# Altium PCB LM-008.PcbDoc
Units mm, origin at the board's own origin, x right, y up, seen from the top; angles counter-clockwise.
Board outline 67.05 x 70.02 mm, 2 copper layers (Top Layer, Bottom Layer); 32 components, 24 nets, 139 pads, 9 vias.
Unrouted connection lines stored in the file: 1.
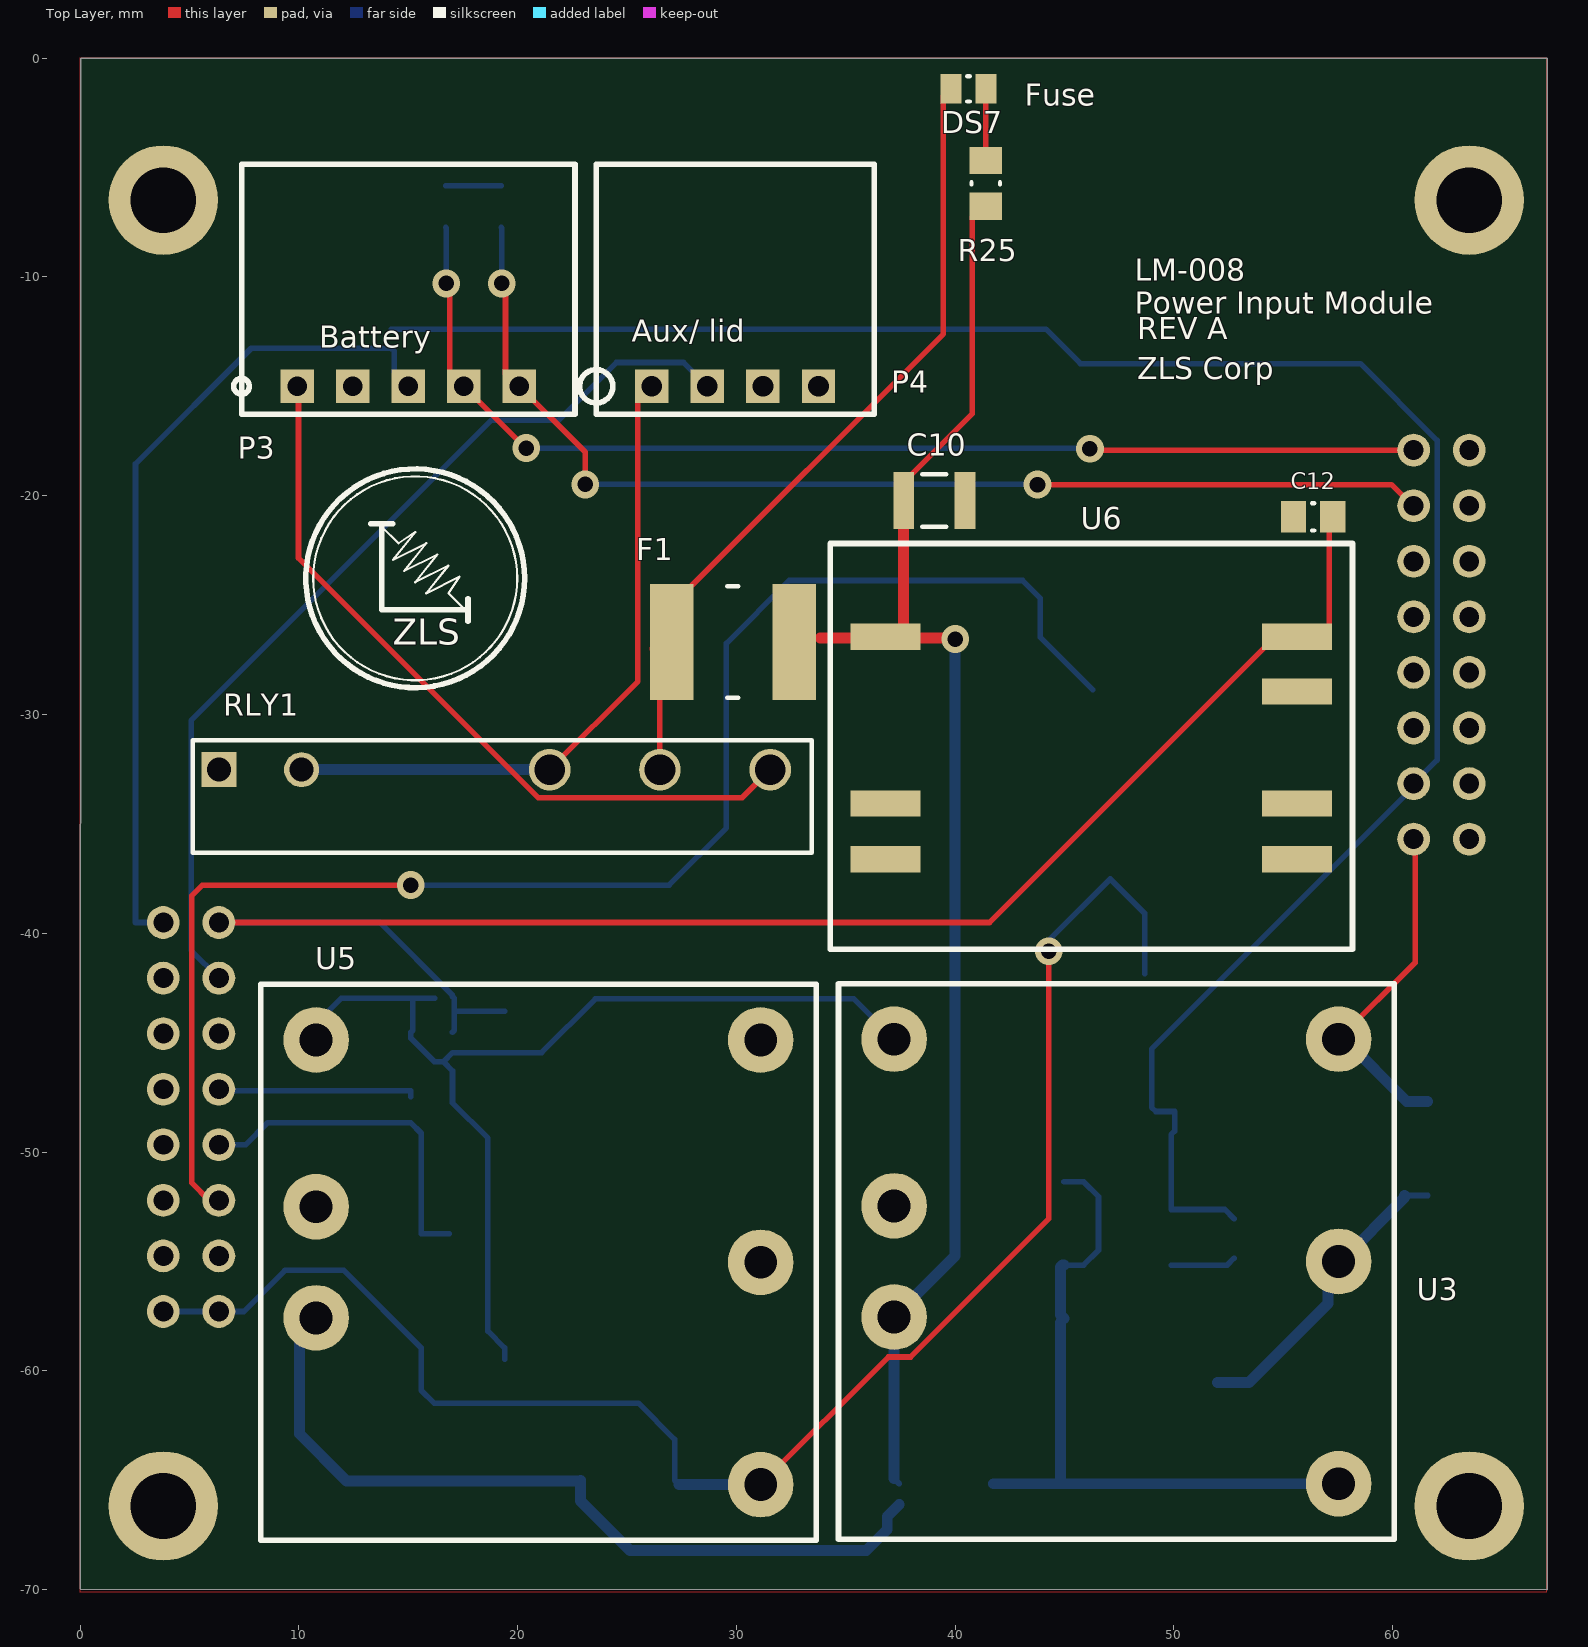
[diagram p0: Top Layer view]
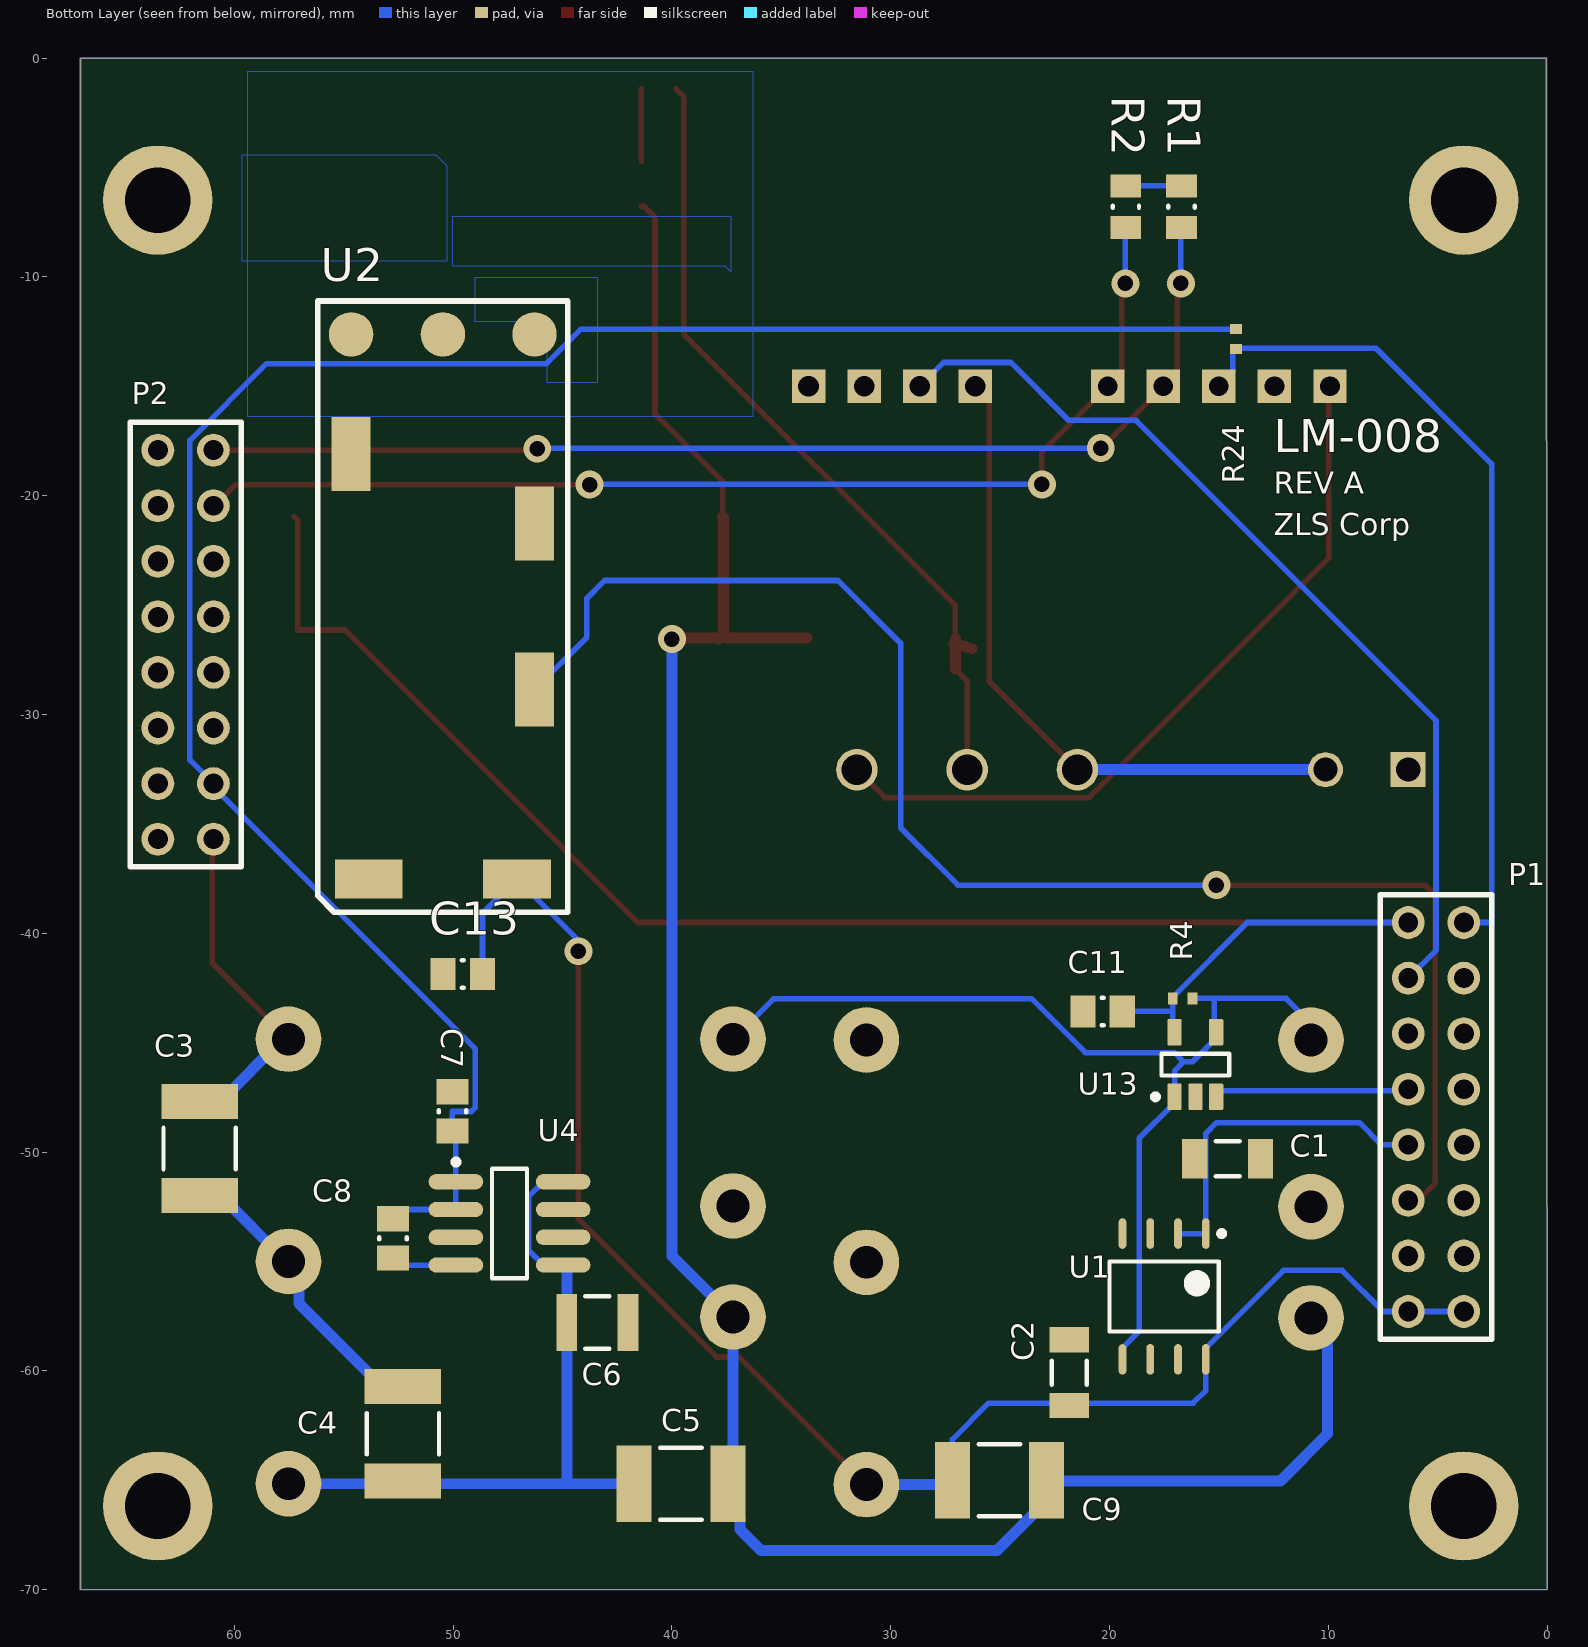
[diagram p1: Bottom Layer view, seen from below]

## Layer stack, top to bottom
Top Solder: solder mask 0.0102, Solder Resist, Dk 3.5
Top Layer: signal copper 0.0356
Dielectric 1: dielectric 0.32, FR-4, Dk 4.8
Bottom Layer: signal copper 0.0356
Bottom Solder: solder mask 0.0102, Solder Resist, Dk 3.5

## Board outline
0,-69.988 67.049,-70.013 67.049,0.002 0.025,0

## Design rules (kind name [scope] priority, off if disabled: settings)
Clearance [All] p1: gap=0.2 ignorepadtopadclearanceinfootprint=TRUE except(0.1: SMDPad-SMDPad)
HoleSize [All] p1: absolutevalues=TRUE maxlimit=5 minlimit=0.025 maxpercent=80.000 minpercent=20.000
MinimumSolderMaskSliver [All] p1: minsoldermaskwidth=0.095
PolygonConnect [All] p1: connectstyle=Relief reliefconductorwidth=0.254 reliefentries=4 polygonreliefangle="90 Angle" airgapwidth=0.254
RoutingVias [All] p1: holewidth=0.711 width=1.27 viastyle="Through Hole" minholewidth=0.711 minwidth=1.27 maxholewidth=0.711 maxwidth=1.27
SilkToSilkClearance [All] p1: silktosilkclearance=0.2
SilkToSolderMaskClearance [IsPad] p1: minsilkscreentomaskgap=0.175 clearancetoexposedcopper=TRUE
SolderMaskExpansion [All] p1: expansion=0.102
Width [All] p1: maxlimit=1 minlimit=0.254 preferedwidth=0.254
26 further rules are at their usual default settings.

## Classes and differential pairs
component class Power_Input: DS7 F1 P3 P4 P? R1 R2 R24 R25 RL2 RL? RLY1
component class LM-008: C1 C2 C3 C4 C5 C6 C7 C8 C9 C10 C11 C12 C13 P1 P2 R4 U1 U2 U3 U4 U5 U6 U13

## Components (designator, comment, footprint, x,y, rotation, side; value= is the part's Value field where it differs from the comment)
C1 "CAP CER 1UF 50V X7R 1210" CAPC1206(3216)130_N 14.598,-50.303 r0 bottom
C2 "CAP CER 1UF 50V X7R 1210" CAPC1206(3216)130_N 21.837,-60.082 r270 bottom
C3 "CAP CER 470PF 3KV X7R 1812" CAPC1812(4532)230_M 61.59,-49.835 r270 bottom
C4 "CAP CER 470PF 3KV X7R 1812" CAPC1812(4532)230_M 52.292,-62.876 r90 bottom
C5 "CAP CER 470PF 3KV X7R 1812" CAPC1812(4532)230_M 39.592,-65.162 r0 bottom
C6 "CAP CER 1UF 50V X7R 1210" CAPC1210(3225)100_L 43.403,-57.785 r0 bottom
C7 "CAP CER 10UF 10V X7R 0805" CAPC0805(2012)145_N 50.031,-48.144 r270 bottom
C8 "CAP CER 10000PF 25V X7R 0805" CAPC0805(2012)145_N 52.751,-53.95 r270 bottom
C9 "CAP CER 470PF 3KV X7R 1812" CAPC1812(4532)230_M 25.025,-65 r0 bottom
C10 "CAP CER 1UF 50V X7R 1210" CAPC1210(3225)100_L 39.043,-20.213 r180 top
C11 "CAP CER 0.1UF 16V X7R 0805" CAPC0805(2012)145_N 20.313,-43.572 r0 bottom
C12 "CAP CER 10UF 10V X7R 0805" CAPC0805(2012)145_N 56.356,-20.966 r0 top
C13 "CAP CER 1UF 16V X7R 0805" CAPC0805(2012)145_N 49.555,-41.859 r180 bottom
DS7 "Lite-On LTST-S220KGKT Green LED, 571 nm 2012 (0805) Side View, Rectangle Lens SMD package" 0805C_L 40.608,-1.408 r0 top
F1 "PCT" CAPC7451X12N 29.838,-26.681 r0 top
P1 "TLW-108-05-G-D" TLW-108-05-G-D 5.073,-48.398 r270 bottom
P2 "TLW-108-05-G-D" TLW-108-05-G-D 62.223,-26.808 r270 bottom
P3 "IPL1-105-01-F-S-RA" IPL1-105-01-F-S-RA 15,-15 r0 top
P4 "IPL1-104-01-L-S-RA-K" IPL1-104-01-L-S-RA-K 26.13,-15 r0 top
R1 "3K74 0.125W 1% 0805 (2012 Metric)  SMD" RESC0805(2012)_N 16.709,-6.79 r90 bottom
R2 "3K74 0.125W 1% 0805 (2012 Metric)  SMD" RESC0805(2012)_N 19.249,-6.79 r90 bottom
R4 "100K" RESC0402(1005)_L 16.657,-42.977 r0 bottom
R24 "6.98K" RESC0402(1005)_L 14.217,-12.838 r90 bottom
R25 "RES SMD 4.7K OHM 1% 1/8W 0805" RESC0805(2012)_M 41.395,-5.726 r90 top
RLY1 "APF30312" PNSC-PF-5-2800x500x1500_V 6.343,-32.523 r0 top
U1 "BD90GA3WEFJ-E2" TSOP127P600X100-8N 17.5,-56.6 r270 bottom
U2 "ABXS002A3X41-SRZ" ABXS002A3X41-SRZ 50.47,-25.07 r90 bottom
U3 "PXB15-24WD05/N" PXB15-24WD05/N 57.525,-55 r0 top
U4 "LT1763CS8-5#PBF" LT-S8-8_M 47.422,-53.261 r180 bottom
U5 "CCG302412S" CCG30 10.788,-52.5 r0 top
U6 "CC1R5-0505SR-E" CC1R5-0505SR-E 36.823,-36.663 r0 top
U13 "OPA188AIDBVR" DBV0005A_M 16.073,-45.999 r90 bottom

## Footprints (in the part's own frame and the unit in brackets; to place one, negate y for a bottom-side part, rotate by r counter-clockwise, add the part's x,y. Pads: shape width x height; smd on the part's side, far side on the other; paste and mask are expansions set on the pad)
0805C_L [mm]
  rect 0.95x1.35 smd: 1(-0.8,0) 2(0.8,0)
  silkscreen extent -0.05,-0.57 0.05,0.58, body extent -1.1,-0.72 1.1,0.72, height 0.75
ABXS002A3X41-SRZ [mm] "DC/DC CONVERTER 16-34V 65W"
  rect 3.385x1.78 smd: 1(3.795,-4.19) 2(-3.795,-4.19) 5(6.975,4.19)
  rect 1.78x3.1 smd: 3(-12.445,-3.385) 4(-12.445,3.385)
  round 2.03 smd: 6(12.445,4.19) 7(12.445,0) 8(12.445,-4.19)
  silkscreen extent -13.97,-5.72 13.97,5.72, body extent -14.1,-5.84 14.1,5.84, height 7.5
CAPC0805(2012)145_N [mm] "Chip Capacitor, Body 2.0x1.2mm, Height 1.45mm, IPC Medium Density"
  rect 1.15x1.45 smd: 1(-0.9,0) 2(0.9,0)
  silkscreen extent -0.05,-0.62 0.05,0.63, body extent -1.1,-0.72 1.1,0.73, height 1.45
CAPC1206(3216)130_N [mm] "Chip Capacitor, Body 3.2x1.6mm, Height 1.3mm, IPC Medium Density"
  rect 1.15x1.8 smd: 1(-1.5,0) 2(1.5,0)
  silkscreen extent -0.55,-0.8 0.55,0.8, body extent -1.7,-0.9 1.7,0.9, height 1.3
CAPC1210(3225)100_L [mm] "Chip Capacitor, Body 3.2x2.5mm, Height 1mm, IPC High Density"
  rect 0.95x2.6 smd: 1(-1.4,0) 2(1.4,0)
  silkscreen extent -0.55,-1.2 0.55,1.2, body extent -1.7,-1.35 1.7,1.35, height 1
CAPC1812(4532)230_M [mm] "Chip Capacitor, Body 4.5x3.2mm, Height 2.3mm, IPC Low Density"
  rect 1.6x3.5 smd: 1(-2.15,0) 2(2.15,0)
  silkscreen extent -0.95,-1.65 0.95,1.65, body extent -2.4,-1.7 2.4,1.7, height 2.3
CAPC7451X12N [mm] "Chip Capacitor, 2-Leads, Body 7.36x5.12mm, IPC Medium Density"
  rect 2x5.3 smd: 1(-2.8,0) 2(2.8,0)
  silkscreen extent -0.25,-2.55 0.25,2.55, body extent -3.99,-2.72 3.99,2.72, height 1.25
CC1R5-0505SR-E [mm] "DC-DC Converter"
  rect 3.2x1.2 smd: 1(0,10.211) 2(0,2.591) 3(0,0.051) 4(18.8,0.051) 5(18.8,2.591) 6(18.8,7.711) 7(18.8,10.211)
  silkscreen extent -2.54,-4.06 21.34,14.48, body extent -1.7,-3.33 20.5,13.56, height 8.8
CCG30 [mm] "DC-DC Converter"
  round 3 hole 1.5: 1(0,7.62) 2(0,0) 3(0,-5.08) 4(20.32,-12.7) 5(20.32,-2.54) 6(20.32,7.62)
  silkscreen extent -2.54,-15.24 22.86,10.16, body extent -2.67,-15.37 22.99,10.29, height 9.9
DBV0005A_M [mm] "SOT23, 5-Leads, Body 3.05x1.75mm, Pitch 0.95mm, IPC Low Density"
  rrect15% 1.2x0.65 smd: 1(-1.475,0.95) 2(-1.475,0) 3(-1.475,-0.95) 4(1.475,-0.95) 5(1.475,0.95)
  silkscreen extent -1.6,-1.55 0.5,1.95, body extent -1.42,-1.46 1.42,1.46, height 1.08
IPL1-104-01-L-S-RA-K [mil]
  rect 60x60 hole 37.4: 1(0,0) 2(100,0) 3(200,0) 4(300,0)
  silkscreen extent -130,-50 400,400, body extent -80,-12 380,380, height 258
IPL1-105-01-F-S-RA [mil]
  rect 60x60 hole 35.43: 1(-200,0) 2(-100,0) 3(0,0) 4(100,0) 5(200,0)
  silkscreen extent -314,-50 300,400, body extent -270,-7 290,390, height 258
LT-S8-8_M [mm] "SOIC, 8-Leads, Body 4.9x3.9mm, Pitch 1.27mm, IPC Low Density"
  oval 2.5x0.7 smd: 1(-2.45,1.905) 2(-2.45,0.635) 3(-2.45,-0.635) 4(-2.45,-1.905) 5(2.45,-1.905) 6(2.45,-0.635) 7(2.45,0.635) 8(2.45,1.905)
  silkscreen extent -2.58,-2.5 0.8,2.93, body extent -2,-2.5 2,2.5, height 1.76
PNSC-PF-5-2800x500x1500_V [mm] "PF, 5-Leads, Body 28x5mm"
  rect 1.6x1.6 hole 1.1: 1(0,0)
  round 1.6 hole 1.1: 2(3.78,0)
  round 1.9 hole 1.4: 3(15.12,0) 4(20.16,0) 5(25.2,0)
  silkscreen extent -1.2,-3.8 27.1,1.35, body extent -0.9,-3.8 27.1,1.2, height 15
PXB15-24WD05/N [mm] "DC-DC CONV 15W DUAL 5V"
  round 3 hole 1.5: 1(-20.32,10.16) 2(-20.32,2.54) 3(-20.32,-2.54) 4(0,-10.16) 5(0,0) 6(0,10.16)
  silkscreen extent -22.86,-12.7 2.54,12.7, body extent -22.99,-12.83 2.67,12.83, height 9.9
RESC0402(1005)_L [mm] "Chip Resistor, Body 1.0x0.5mm, IPC High Density"
  rect 0.45x0.55 smd: 1(-0.45,0) 2(0.45,0)
  body extent -0.52,-0.27 0.53,0.28, height 0.4
RESC0805(2012)_M [mm] "Chip Resistor, Body 2.0x1.3mm, IPC Low Density"
  rect 1.25x1.5 smd: 1(-1.05,0) 2(1.05,0)
  silkscreen extent -0.05,-0.65 0.05,0.65, body extent -1.1,-0.67 1.1,0.67, height 0.7
RESC0805(2012)_N [mm] "Chip Resistor, Body 2.0x1.3mm, IPC Medium Density"
  rect 1.05x1.4 smd: 1(-0.95,0) 2(0.95,0)
  silkscreen extent -0.05,-0.6 0.05,0.6, body extent -1.1,-0.67 1.1,0.68, height 0.7
TLW-108-05-G-D [mm]
  round 1.5 hole 0.91: 1(-8.89,-1.27) 2(-8.89,1.27) 3(-6.35,-1.27) 4(-6.35,1.27) 5(-3.81,-1.27) 6(-3.81,1.27) 7(-1.27,-1.27) 8(-1.27,1.27) 9(1.27,-1.27) 10(1.27,1.27) 11(3.81,-1.27) 12(3.81,1.27) 13(6.35,-1.27) 14(6.35,1.27) 15(8.89,-1.27) 16(8.89,1.27)
  silkscreen extent -10.16,-2.54 10.16,2.54, body extent -10.16,-2.51 10.16,2.51, height 6.35
TSOP127P600X100-8N [mm] "TSOP, 8-Leads, Body 4.90x3.90mm, Pitch 1.27mm, IPC Medium Density"
  oval 1.4x0.35 smd: 1(-2.875,1.905) 2(-2.875,0.635) 3(-2.875,-0.635) 4(-2.875,-1.905) 5(2.875,-1.905) 6(2.875,-0.635) 7(2.875,0.635) 8(2.875,1.905)
  silkscreen extent -3,-2.5 1.6,2.75, body extent -2,-2.5 2,2.5, height 1

## Part data
C1 C2: library part CMP-1037-04913-1, Capacitance=1µF, Manufacturer="Murata Electronics North America", Manufacturer Part Number=GRM32RR71H105KA01L, Operating Temperature="-55°C ~ 125°C", Package / Case="1210 (3225 Metric)", Ratings=-, Supplier Part Number 1=490-1863-6-ND, Temperature Coefficient=X7R, Tolerance=±10%, Voltage - Rated=50V, Applications="General Purpose", Category=Capacitors, ComponentLink1Description=http://search.murata.co.jp/Ceramy/image/img/A01X/G101/ENG/GRM32RR71H105KA01-01.pdf, ComponentLink1URL=http://search.murata.co.jp/Ceramy/image/img/A01X/G101/ENG/GRM32RR71H105KA01-01.pdf, Features=-, Height - Seated (Max)=-, Lead Spacing=-, Lead Style=-, Mounting Type="Surface Mount, MLCC", Packaging=Digi-Reel®, Part Status=Active, Pricing 1="1=0.35, 10=0.242, 100=0.1449, 500=0.10868 (USD)", RoHS="RoHS Compliant", Size / Dimension="0.126\" L x 0.098\" W (3.20mm x 2.50mm)", Stock 1=66890, Supplier 1=Digi-Key, Thickness (Max)="0.079\" (2.00mm)"
C3 C4 C5 C9: library part CMP-1040-00561-1, Capacitance=470pF, Case/Package=1812, Case Code (Metric)=4532, Manufacturer=Kemet, Manufacturer Part Number=C1812C471KHRACTU, Max Operating Temperature=125°C, Min Operating Temperature=-55°C, Package Quantity=1, Supplier Part Number 1=399-7289-6-ND, Tolerance=10%, Voltage Rating=3kV, Case Code (Imperial)=1812, ComponentLink1Description=http://www.kemet.com/docfinder?Partnumber=C1812C471KHRACTU, ComponentLink1URL=http://www.kemet.com/docfinder?Partnumber=C1812C471KHRACTU, Lead Free="Lead Free", Length=0.177inch, Packaging="Tape and Reel", Pricing 1="1=0.88, 10=0.666, 100=0.4761 (USD)", Stock 1=2705, Supplier 1=Digi-Key, Thickness=0.071inch, Voltage Rating (DC)=3kV, Width=0.126inch
C6 C10: library part CMP-1038-00632-1, Capacitance=1µF, Manufacturer="Murata Electronics North America", Manufacturer Part Number=GRM32RR71H105KA01L, Operating Temperature="-55°C ~ 125°C", Package / Case="1210 (3225 Metric)", Ratings=-, Supplier Part Number 1=490-1863-6-ND, Temperature Coefficient=X7R, Tolerance=±10%, Voltage - Rated=50V, Applications="General Purpose", Category=Capacitors, ComponentLink1Description=http://search.murata.co.jp/Ceramy/image/img/A01X/G101/ENG/GRM32RR71H105KA01-01.pdf, ComponentLink1URL=http://search.murata.co.jp/Ceramy/image/img/A01X/G101/ENG/GRM32RR71H105KA01-01.pdf, Features=-, Height - Seated (Max)=-, Lead Spacing=-, Lead Style=-, Mounting Type="Surface Mount, MLCC", Packaging=Digi-Reel®, Part Status=Active, Pricing 1="1=0.35, 10=0.242, 100=0.1449, 500=0.10868 (USD)", RoHS="RoHS Compliant", Size / Dimension="0.126\" L x 0.098\" W (3.20mm x 2.50mm)", Stock 1=66890, Supplier 1=Digi-Key, Thickness (Max)="0.079\" (2.00mm)"
C7 C12: library part CMP-1036-04795-1, Capacitance=10µF, Manufacturer="Murata Electronics North America", Manufacturer Part Number=GCM21BR71A106KE22L, Operating Temperature="-55°C ~ 125°C", Package / Case="0805 (2012 Metric)", Ratings=AEC-Q200, Supplier Part Number 1=490-10674-6-ND, Temperature Coefficient=X7R, Tolerance=±10%, Voltage - Rated=10V, Applications=Automotive, Category=Capacitors, ComponentLink1Description=http://search.murata.co.jp/Ceramy/image/img/A01X/G101/ENG/GCM21BR71A106KE22-01.pdf, ComponentLink1URL=http://search.murata.co.jp/Ceramy/image/img/A01X/G101/ENG/GCM21BR71A106KE22-01.pdf, Features=-, Height - Seated (Max)=-, Lead Spacing=-, Lead Style=-, Mounting Type="Surface Mount, MLCC", Packaging=Digi-Reel®, Part Status=Active, Pricing 1="1=0.49, 10=0.347, 100=0.2282, 500=0.16906, 1000=0.14369 (USD)", RoHS="RoHS Compliant", Size / Dimension="0.079\" L x 0.049\" W (2.00mm x 1.25mm)", Stock 1=136726, Supplier 1=Digi-Key, Thickness (Max)="0.055\" (1.40mm)"
C8: library part CMP-1036-04795-1, Capacitance=10000pF, Manufacturer="Murata Electronics North America", Manufacturer Part Number=GRM216R71E103KA01D, Operating Temperature="-55°C ~ 125°C", Package / Case="0805 (2012 Metric)", Ratings=-, Supplier Part Number 1=490-12748-6-ND, Temperature Coefficient=X7R, Tolerance=±10%, Voltage - Rated=25V, Applications="General Purpose", Category=Capacitors, ComponentLink1Description=http://www.murata.com/~/media/webrenewal/support/library/catalog/products/capacitor/mlcc/c02e.ashx, ComponentLink1URL=http://www.murata.com/~/media/webrenewal/support/library/catalog/products/capacitor/mlcc/c02e.ashx, Features=-, Height - Seated (Max)=-, Lead Spacing=-, Lead Style=-, Mounting Type="Surface Mount, MLCC", Packaging=Digi-Reel®, Part Status=Active, Pricing 1="1=0.11, 10=0.077, 100=0.0343, 500=0.02452, 1000=0.01926 (USD)", RoHS="RoHS Compliant", Size / Dimension="0.079\" L x 0.049\" W (2.00mm x 1.25mm)", Stock 1=13127, Supplier 1=Digi-Key, Thickness (Max)="0.028\" (0.70mm)"
C11: library part CMP-1036-04795-1, Capacitance=0.1µF, Manufacturer="Murata Electronics North America", Manufacturer Part Number=GRM219R71C104KA01D, Operating Temperature="-55°C ~ 125°C", Package / Case="0805 (2012 Metric)", Ratings=-, Supplier Part Number 1=490-1673-6-ND, Temperature Coefficient=X7R, Tolerance=±10%, Voltage - Rated=25V, Applications="General Purpose", Category=Capacitors, ComponentLink1Description=http://www.murata.com/~/media/webrenewal/support/library/catalog/products/capacitor/mlcc/c02e.ashx, ComponentLink1URL=http://www.murata.com/~/media/webrenewal/support/library/catalog/products/capacitor/mlcc/c02e.ashx, Features=-, Height - Seated (Max)=-, Lead Spacing=-, Lead Style=-, Mounting Type="Surface Mount, MLCC", Packaging=Digi-Reel®, Part Status=Active, Pricing 2="1=0.14, 10=0.098, 100=0.0462, 500=0.0324, 1000=0.02683 (USD)", RoHS="RoHS Compliant", Size / Dimension="0.079\" L x 0.049\" W (2.00mm x 1.25mm)", Stock 2=245331, Supplier 2=Digi-Key, Supplier Part Number 2=490-1683-6-ND, Thickness (Max)="0.053\" (1.35mm)"
C13: library part CMP-1036-04795-1, Capacitance=1µF, Manufacturer="Taiyo Yuden", Manufacturer Part Number=EMK212B7105KG-T, Operating Temperature="-55°C ~ 125°C", Package / Case="0805 (2012 Metric)", Ratings=-, Supplier Part Number 1=587-1283-1-ND, Temperature Coefficient=X7R, Tolerance=±10%, Voltage - Rated=16V, Applications="General Purpose", Category=Capacitors, ComponentLink1Description=http://ds.yuden.co.jp/TYCOMPAS/ut/detail.do?productNo=EMK212B7105KG-T&fileName=EMK212B7105KG-T_SS&mode=specSheetDownload, ComponentLink1URL=http://ds.yuden.co.jp/TYCOMPAS/ut/detail.do?productNo=EMK212B7105KG-T&fileName=EMK212B7105KG-T_SS&mode=specSheetDownload, Features=-, Height - Seated (Max)=-, Lead Spacing=-, Lead Style=-, Mounting Type="Surface Mount, MLCC", Packaging="Cut Tape (CT)", Part Status=Active, Pricing 1="1=0.13, 10=0.089, 100=0.042, 1000=0.02439 (USD)", RoHS="RoHS Compliant", Size / Dimension="0.079\" L x 0.049\" W (2.00mm x 1.25mm)", Stock 1=41495, Supplier 1=Digi-Key, Thickness (Max)="0.053\" (1.35mm)"
DS7: library part "LED A/K", Case/Package=0805, Case Code (Metric)=2012, Colour=Green, Forward Current=20mA, Forward Voltage=2V, Lens Colour=Colorless, Manufacturer="Vishay / Lite-On", Manufacturer Part Number=LTST-S220KGKT, Max Operating Temperature=85°C, Min Operating Temperature=-55°C, Package Quantity=4000, Power Dissipation=75W, Power Rating=75mW, Supplier Part Number 1=160-1468-1-ND, Case Code (Imperial)=0805, ComponentLink1Description=https://datasheet.ciiva.com/11775/0900766b80dc0b70-11775441.pdf, ComponentLink1URL=https://datasheet.ciiva.com/11775/0900766b80dc0b70-11775441.pdf, ComponentLink2Description=https://datasheet.ciiva.com/2110/s-110-ltst-s220kgkt-2110069.pdf, ComponentLink2URL=https://datasheet.ciiva.com/2110/s-110-ltst-s220kgkt-2110069.pdf, ComponentLink3Description=https://datasheet.ciiva.com/2110/s-110-ltst-s220kgkt-2110070.pdf, ComponentLink3URL=https://datasheet.ciiva.com/2110/s-110-ltst-s220kgkt-2110070.pdf, ComponentLink4Description=https://datasheet.ciiva.com/12400/100-ltst-s220kgkt-59602-12400886.pdf, ComponentLink4URL=https://datasheet.ciiva.com/12400/100-ltst-s220kgkt-59602-12400886.pdf, ComponentLink5Description=https://datasheet.ciiva.com/2110/s-110-ltst-s220kgkt-2110071.pdf, ComponentLink5URL=https://datasheet.ciiva.com/2110/s-110-ltst-s220kgkt-2110071.pdf, ComponentLink6Description=https://datasheet.ciiva.com/16379/ltst-s220kgkt-16379082.pdf, ComponentLink6URL=https://datasheet.ciiva.com/16379/ltst-s220kgkt-16379082.pdf, ComponentLink7Description=http://www.farnell.com/cad/2124774.pdf, ComponentLink7URL=http://www.farnell.com/cad/2124774.pdf, ComponentLink8Description=http://www.farnell.com/datasheets/693084.pdf, ComponentLink8URL=http://www.farnell.com/datasheets/693084.pdf, Depth=0.6mm, Dominant Wavelength=568nm, Height=0.6mm, Illumination Colour=Green, Lead Free="Lead Free", Length=2.1mm, Lens Style=Diffused,Colorless, Lens Transparency=Clear, Luminous Intensity=35mcd, Mount="Surface Mount", Number of Elements=1, Number of LEDs=1, Number of Pins=2, Packaging="Tape and Reel", Pricing 1="1=0.29, 10=0.212, 25=0.1564, 100=0.1117, 250=0.0759, 500=0.067, 1000=0.0525 (USD)", Pricing 2="1=0.325, 10=0.317, 100=0.23, 200=0.228, 400=0.182, 900=0.147, 3000=0.114, 9000=0.107 (GBP)", Radiation Hardening=No, RoHS=YES, Stock 1=74800, Stock 2=2271, Supplier 1=Digi-Key, Supplier 2=Farnell, Supplier Part Number 2=2062310, Test Current=20mA, Viewing Angle=130°, Wavelength=574nm, Width=1mm
P1 P2: "CONN HEADER .100\" 16POS DL GOLD", Current Rating="5.2A per Contact", Insulation Color=Black, Manufacturer="Samtec Inc.", Material Flammability Rating=-, Operating Temperature="-55°C ~ 125°C", Supplier Part Number 1=SAM1094-08-ND, Applications=-, Category="Connectors, Interconnects", ComponentLink1Description=http://suddendocs.samtec.com/prints/tlw-mkt.pdf, ComponentLink1URL=http://suddendocs.samtec.com/prints/tlw-mkt.pdf, Connector Type=Header, Contact Finish - Mating=Gold, Contact Finish - Post=Gold, Contact Finish Thickness - Mating="10µin (0.25µm)", Contact Finish Thickness - Post=Flash, Contact Length - Mating="0.105\" (2.67mm)", Contact Length - Post="0.170\" (4.32mm)", Contact Material="Phosphor Bronze", Contact Shape=Square, Contact Type="Male Pin", Fastening Type=Push-Pull, Features=-, Ingress Protection=-, Insulation Height="0.060\" (1.52mm)", Insulation Material="Liquid Crystal Polymer (LCP)", Manufacturer Part Number=TLW-108-05-G-D, Mated Stacking Heights=-, Mounting Type="Through Hole", Number of Positions=16, Number of Positions Loaded=All, Number of Rows=2, Overall Contact Length="0.335\" (8.51mm)", Packaging=Bulk, Part Status=Active, Pitch - Mating="0.100\" (2.54mm)", Pricing 1="1=4.48, 10=4.006, 100=3.2987, 500=2.60756, 1000=2.23842, 5000=2.04207, 10000=1.96353 (USD)", RoHS="RoHS Compliant", Row Spacing - Mating="0.100\" (2.54mm)", Shrouding=Unshrouded, Stock 1=0, Style="Board to Board or Cable", Supplier 1=Digi-Key, Termination=Solder, Voltage Rating=-
P3: Supplier Part Number 1=IPL1-105-01-F-S-RA-K-ND, Supplier 1=Digi-Key
P4: Current Rating=-, Insulation Color=Natural, Manufacturer="Samtec Inc.", Material Flammability Rating="UL94 V-0", Operating Temperature="-55°C ~ 125°C", Supplier Part Number 1=SAM9597-ND, Voltage Rating="675VAC, 954VDC", Applications=-, Category="Connectors, Interconnects", ComponentLink1Description=http://suddendocs.samtec.com/prints/ipl1-1xx-xx-xxx-s-xx-x-xx-mkt.pdf, ComponentLink1URL=http://suddendocs.samtec.com/prints/ipl1-1xx-xx-xxx-s-xx-x-xx-mkt.pdf, Connector Type=Header, Contact Finish - Mating=Gold, Contact Finish - Post=Tin, Contact Finish Thickness - Mating="10µin (0.25µm)", Contact Finish Thickness - Post=-, Contact Length - Mating="0.215\" (5.46mm)", Contact Length - Post="0.085\" (2.16mm)", Contact Material="Phosphor Bronze", Contact Shape=Square, Contact Type="Male Pin", Fastening Type="Locking Ramp", Features=-, Ingress Protection=-, Insulation Height="0.240\" (6.10mm)", Insulation Material="Liquid Crystal Polymer (LCP)", Manufacturer Part Number=IPL1-104-01-L-S-RA-K, Mated Stacking Heights=-, Mounting Type="Through Hole, Right Angle", Number of Positions=4, Number of Positions Loaded=All, Number of Rows=1, Overall Contact Length=-, Packaging=Tube, Part Status=Active, Pitch - Mating="0.100\" (2.54mm)", Pricing 1="1=2.53, 10=2.424, 100=2.02, 500=1.717, 1000=1.4645, 5000=1.313 (USD)", RoHS="RoHS Compliant", Row Spacing - Mating=-, Shrouding="Shrouded - 4 Wall", Stock 1=265, Style="Board to Cable/Wire", Supplier 1=Digi-Key, Termination=Solder
R1 R2: library part CMP-1013-00574-1, Manufacturer="Vishay Dale", Manufacturer Part Number=CRCW08054K70FKEA, Operating Temperature="-55°C ~ 155°C", Package / Case="0805 (2012 Metric)", Power (Watts)="0.125W, 1/8W", Resistance (Ohms)=4.7k, Supplier Device Package=0805, Supplier Part Number 1=541-4.70KCDKR-ND, Temperature Coefficient=±100ppm/°C, Tolerance=±1%, Category=Resistors, ComponentLink1Description=http://www.vishay.com/docs/20035/dcrcwe3.pdf, ComponentLink1URL=http://www.vishay.com/docs/20035/dcrcwe3.pdf, Composition="Thick Film", Failure Rate=-, Features="Automotive AEC-Q200", Height - Seated (Max)="0.020\" (0.50mm)", Packaging=Digi-Reel®, Part Status=Active, Pricing 1="1=0.1, 10=0.044, 100=0.0178, 1000=0.00802, 2500=0.00696 (USD)", RoHS="RoHS Compliant", Size / Dimension="0.079\" L x 0.049\" W (2.00mm x 1.25mm)", Stock 1=0, Supplier 1=Digi-Key
R4: library part CMP-1011-00927-1, Supplier Device Package=0402, Supplier Part Number 1=YAG3220CT-ND, Temperature Coefficient=±100ppm/°C, Tolerance=±1%
R24: library part CMP-1011-00927-1, "RES SMD 6.98K OHM 1% 1/16W 0402", Manufacturer=Yageo, Manufacturer Part Number=RC0402FR-076K98L, Operating Temperature="-55°C ~ 155°C", Package / Case="0402 (1005 Metric)", Power (Watts)="0.063W, 1/16W", Supplier Device Package=0402, Supplier Part Number 1=YAG3220CT-ND, Temperature Coefficient=±100ppm/°C, Tolerance=±1%, Category=Resistors, ComponentLink1Description=http://www.yageo.com/documents/recent/PYu-RC_Group_51_RoHS_L_7.pdf, ComponentLink1URL=http://www.yageo.com/documents/recent/PYu-RC_Group_51_RoHS_L_7.pdf, Composition="Thick Film", Failure Rate=-, Features="Moisture Resistant", Height - Seated (Max)="0.016\" (0.40mm)", Packaging="Cut Tape (CT)", Part Status=Active, Pricing 1="1=0.1, 10=0.014, 100=0.0055, 1000=0.00247, 2500=0.00214, 5000=0.00177 (USD)", RoHS="RoHS Compliant", Size / Dimension="0.039\" L x 0.020\" W (1.00mm x 0.50mm)", Stock 1=182255, Supplier 1=Digi-Key
R25: library part CMP-1013-00017-1, Manufacturer="Vishay Dale", Manufacturer Part Number=CRCW08054K70FKEA, Operating Temperature="-55°C ~ 155°C", Package / Case="0805 (2012 Metric)", Power (Watts)="0.125W, 1/8W", Resistance (Ohms)=4.7k, Supplier Device Package=0805, Supplier Part Number 1=541-4.70KCDKR-ND, Temperature Coefficient=±100ppm/°C, Tolerance=±1%, Category=Resistors, ComponentLink1Description=http://www.vishay.com/docs/20035/dcrcwe3.pdf, ComponentLink1URL=http://www.vishay.com/docs/20035/dcrcwe3.pdf, Composition="Thick Film", Failure Rate=-, Features="Automotive AEC-Q200", Height - Seated (Max)="0.020\" (0.50mm)", Packaging=Digi-Reel®, Part Status=Active, Pricing 1="1=0.1, 10=0.044, 100=0.0178, 1000=0.00802, 2500=0.00696 (USD)", RoHS="RoHS Compliant", Size / Dimension="0.079\" L x 0.049\" W (2.00mm x 1.25mm)", Stock 1=0, Supplier 1=Digi-Key
RLY1: library part CMP-1503-00270-1, "PF Relays, 12 V Coil Voltage, 170 mW Nominal Operating Power, -40 to 85 degC, 5-Pin PF, Tube, Case, RoHS", Coil Voltage="12 V", Manufacturer=Panasonic, Max Switching Current="6 A", Max Switching Voltage="250 V AC", Nominal Operating Power="170 mW", ComponentLink1Description="Manufacturer URL", ComponentLink1URL=http://www3.panasonic.biz/ac/ae/index.jsp, ComponentLink2Description=Datasheet, ComponentLink2URL=http://www3.panasonic.biz/ac/e_download/control/relay/power/catalog/mech_eng_pf.pdf?f_cd=300412, ComponentLink3Description="Package Specification", ComponentLink3URL=http://www3.panasonic.biz/ac/e_download/control/relay/power/catalog/mech_eng_pf.pdf?f_cd=300412, DatasheetVersion=201402-T, Electrical Life="5x10^4 (N.O.), 3x10^4 (N.C.)", Mechanical Life(Min.operation)=5x10^6, Mounting Technology="Through Hole", PackageDescription="5-Pin Through Hole Terminal Package, Body 28 x 5 mm", PackageReference=PF-5-2800x500x1500, PackageVersion="ASCTB205E, 02/2014", Packing="Tube, Case", PartNumber=APF30312, Pb-Free=True, RoHS=True, Series="PF Relays"
U1: "IC REG LDO 9V 0.3A 8HTSOP-J", Current - Limit (Min)=-, Current - Output=300mA, Manufacturer="Rohm Semiconductor", Operating Temperature="-25°C ~ 85°C", Package / Case="8-SOIC (0.154\", 3.90mm Width) Exposed Pad", Supplier Device Package=8-HTSOP-J, Supplier Part Number 1=BD90GA3WEFJ-E2CT-ND, Voltage - Dropout (Typical)="0.6V @ 300mA", Voltage - Input="Up to 14V", Voltage - Output=9V, Category="Integrated Circuits (ICs)", ComponentLink1Description=http://rohmfs.rohm.com/en/products/databook/datasheet/ic/power/linear_regulator/bdxxga3wefj-e.pdf, ComponentLink1URL=http://rohmfs.rohm.com/en/products/databook/datasheet/ic/power/linear_regulator/bdxxga3wefj-e.pdf, Manufacturer Part Number=BD90GA3WEFJ-E2, Mounting Type="Surface Mount", Packaging="Cut Tape (CT)", Part Status=Active, Pricing 1="1=0.69, 10=0.606, 25=0.5364, 100=0.4672, 250=0.40664, 500=0.34608, 1000=0.27686 (USD)", Regulator Topology="Positive Fixed", RoHS="RoHS Compliant", Stock 1=4781, Supplier 1=Digi-Key
U2: Supplier Part Number 1=555-1388-1-ND, Supplier 1=Digi-Key
U3: library part CCG302412S, "IC CONV DC-DC 15W DUAL 5V PCB", Current - Output (Max)="1.5A, 1.5A", Manufacturer 1="TDK-Lambda Americas Inc.", Operating Temperature="-40°C ~ 85°C", Package / Case="6-DIP Module", Power (Watts)=15W, Supplier Part Number 1=285-1902-ND, Voltage - Input (Max)=36V, Voltage - Input (Min)=9V, Voltage - Isolation="1.6kV (1600V)", Voltage - Output 1=5V, Voltage - Output 2=-5V, Voltage - Output 3=-, Applications="ITE (Commercial)", Category 1="Power Supplies - Board Mount", ComponentLink1Description=http://us.tdk-lambda.com/ftp/AppNotes/pxb15w-d_appnote.pdf, ComponentLink1URL=http://us.tdk-lambda.com/ftp/AppNotes/pxb15w-d_appnote.pdf, Description 1="IC CONV DC-DC 15W DUAL 5V PCB", Efficiency=85%, Features="Remote On/Off, OCP, OVP, SCP", Manufacturer Part Number 1=PXB15-24WD05/N, Mounting Type="Through Hole", Number of Outputs=2, Packaging=Tube, Part Status=Active, Pricing 1="1=61.61, 10=59.59 (USD)", RoHS 1="RoHS Compliant", Size / Dimension="1.00\" L x 1.00\" W x 0.39\" H (25.4mm x 25.4mm x 9.9mm)", Stock 1=28, Supplier 1=Digi-Key, Type="Isolated Module"
U4: library part CMP-0476-01685-1, "500 mA, Low Noise, LDO Micropower Regulator, 1.8 to 20 V Vin, 5 V Vout, 8-pin SOIC (S8-8), -40 to 125 degC, Pb-Free", Dropout Voltage(V)=0.3, Manufacturer="Linear Technology", Output Voltage="5 V", Shutdown Current(uA)=1, ComponentLink1Description="Manufacturer URL", ComponentLink1URL=http://www.linear.com/, ComponentLink2Description=Datasheet, ComponentLink2URL=http://cds.linear.com/docs/en/datasheet/1763fg.pdf, ComponentLink3Description="Package Specification", ComponentLink3URL=http://cds.linear.com/docs/en/packaging/05081610_G_SO8.pdf, DatasheetVersion="Rev. G", Discrete Pass Element=no, Iout(mA)=500, Isupply(mA)=0.03, Mounting Technology="Surface Mount", Noise(uV)=20, Number of Outputs=1, PackageDescription="8-Pin Plastic Small Outline (Narrow .150 Inch), Body 4.9 x 3.9 mm, Pitch 1.27 mm", PackageReference=S8-8, PackageVersion="Rev. G, 03/2012", PartNumber=LT1763CS8-5#PBF, PSRR(dB)=65, RoHS=TRUE, Vin Max(V)=20, Vin Min(V)=1.8
U5: "DC/DC CONVERTER 12V 2.5A PCB", Current - Output (Max)=2.5A, Manufacturer 1="TDK-Lambda Americas Inc", Operating Temperature="-40°C ~ 85°C", Package / Case="6-DIP Module (6 Leads)", Power (Watts) - Manufacture Series=30W, Supplier Part Number 1=285-2419-ND, Voltage - Input (Max)=36V, Voltage - Input (Min)=9V, Voltage - Isolation="1.5kV (1500V)", Voltage - Output 1=12V, Voltage - Output 2=-, Category 1="Power Supplies - Board Mount", ComponentLink1Description=http://www.us.tdk-lambda.com/ftp/specs/ccg30.pdf, ComponentLink1URL=http://www.us.tdk-lambda.com/ftp/specs/ccg30.pdf, Description 1="DC/DC CONVERTER 12V 2.5A PCB", Efficiency=89%, Features="Remote On/Off, OCP", Manufacturer Part Number 1=CCG302412S, Mounting Type="Through Hole", Number of Outputs=1, Packaging=Tube, Power (Watts) - Max=30W, Pricing 1="1=43.63, 10=42.95 (USD)", RoHS 1="RoHS Compliant", Size / Dimension="1.00\" L x 1.00\" W x 0.39\" H (25.4mm x 25.4mm x 9.9mm)", Stock 1=30, Supplier 1=Digi-Key, Type="Isolated Module", Voltage - Output 3=-
U6: "CONV DC/DC 1.5W SNGL 5V 5V SMD", Current - Output (Max)=300mA, Manufacturer="TDK-Lambda Americas Inc.", Operating Temperature="-40°C ~ 85°C", Package / Case="7-SMD Module", Power (Watts)=1W, Supplier Part Number 1=445-3267-ND, Voltage - Input (Max)=9V, Voltage - Input (Min)=4.5V, Voltage - Isolation=500V, Voltage - Output 1=5V, Voltage - Output 2=-, Applications="ITE (Commercial)", Category="Power Supplies - Board Mount", ComponentLink1Description=http://www.us.tdk-lambda.com/ftp/specs/CC1R5-xR-E_spc_en.pdf, ComponentLink1URL=http://www.us.tdk-lambda.com/ftp/specs/CC1R5-xR-E_spc_en.pdf, Efficiency=-, Features=-, Manufacturer Part Number=CC1R5-0505SR-E, Mounting Type="Surface Mount", Number of Outputs=1, Packaging=Tray, Part Status=Active, Pricing 1="1=9.7, 10=9.24 (USD)", RoHS="RoHS Compliant", Size / Dimension="0.65\" L x 0.65\" W x 0.35\" H (16.5mm x 16.6mm x 8.8mm)", Stock 1=174, Supplier 1=Digi-Key, Type="Isolated Module", Voltage - Output 3=-
U13: library part CMP-0809-00005-2, "Precision, Low Noise, Rail-to-Rail Output, Zero-Drift Operational Amplifier, 4 to 36 V, -40 to 125 degC, 5-pin SOT23 (DBV5), Green (RoHS & no Sb/Br)", Manufacturer="Texas Instruments", Rating=Catalog, Total Supply Voltage(Max)(+5V is 5, +/-5V is 10)=36, Total Supply Voltage(Min)(+5V is 5, +/-5V is 10)=4, CMRR(Min)(dB)=120, Code_JEDEC=MO-178, ComponentLink1Description="Manufacturer URL", ComponentLink1URL=http://www.ti.com/, ComponentLink2Description=Datasheet, ComponentLink2URL=http://www.ti.com/lit/ds/symlink/opa188.pdf, ComponentLink3Description="Package Specification", ComponentLink3URL=http://www.ti.com/litv/pdf/mpds018i, DatasheetVersion=SBOS642A, Eco-Plan="Green (RoHS & no Sb/Br)", GBW(Typ)(MHz)=2, Iq per channel(Max)(mA)=0.51, Mounting Technology="Surface Mount", Number of Channels=1, Offset Drift(Typ)(uV/C)=0.03, PackageDescription="5-Pin Plastic Small Outline, Body 1.6 x 2.9 mm, Pitch 0.95 mm", PackageReference=DBV0005A, PackageVersion="4073253-4/K, 03/2006", PartNumber=OPA188AIDBVR, Slew Rate(Typ)(V/us)=0.8, SubFamily="Zero Drift Precision Amplifier"

## Free pads (board coordinates)
  round 5 hole 3: 3(129.242,-193.156) ""(3.803,-66.178) ""(3.803,-6.488) ""(63.493,-66.178) ""(63.493,-6.488)

## Via types
v1: diameter 1.27, hole 0.711, Top Layer to Bottom Layer, 9 vias

## Nets (pads, with @x,y where several pads share a name; then routed paths per layer and width w, separated by ;. In a path a pad name is that pad's centre, name@x,y a point inside that pad or via, vN(x,y) a via of type N, cw(c..) or ccw(c..) an arc to the next point about the centre after c; other vN are vias at no path point)
5V_RC: R4.1 U1.5 U3.1 U5.1 U13.1 U13.4 | length 48.1
  Bottom Layer w0.254: U5.1@10.025,-44.88 11.929,-42.977 15.209,-42.977 ; R4.1 15.209,-42.977 ; U1.5 19.405,-58.95 18.637,-58.182 18.637,-49.363 17.023,-47.749 17.023,-46.289 16.606,-45.872 ; U3.1 35.364,-42.999 23.549,-42.999 21.096,-45.451 17.027,-45.451 16.606,-45.872 ; 15.209,-42.977 15.209,-44.438 U13.4 15.123,-44.799 16.196,-45.872 16.606,-45.872
+5: C7.2 C8.1 P2.14 R1.2 R2.2 R24.2 U4.1 U4.2 | length 97.1
  Bottom Layer w0.254: R24.2@14.217,-12.421 R24.2@14.25,-12.388 ; R24.2 R24.2@14.25,-12.388 ; R1.2 R2.2 ; C8.1 52.327,-52.626 U4.2 U4.1 49.872,-49.204 C7.2 50.031,-48.146 49.171,-48.146 48.979,-47.954 48.979,-45.293 60.953,-33.319 P2.14 62.03,-32.081 62.03,-17.472 58.525,-13.967 45.724,-13.967 44.145,-12.388 R24.2@14.25,-12.388
"+5 BBB": C11.1 C12.2 P1.1 R4.2 U6.7 U13.5 | length 77.7
  Top Layer w0.254: P1.1 41.568,-39.508 54.937,-26.139 57.096,-26.139 57.096,-21.126 C12.2
  Bottom Layer w0.254: P1.1 13.701,-39.508 17.009,-42.816 17.009,-42.879 R4.2 17.107,-43.572 ; U13.5 17.107,-44.44 17.107,-43.572 ; C11.1 17.107,-43.572
+5V_Raw: C4.1 C5.2 C6.2 U3.4 U4.5 U4.8 | length 32
  Bottom Layer w0.254: C5.2 C5.2@41.744,-65.16 ; 44.672,-65.16 44.803,-65.029 ; U4.5 45.872,-55.166 46.549,-54.489 46.549,-52.033 45.872,-51.356 U4.8
  Bottom Layer w0.5: C5.2@41.744,-65.16 44.672,-65.16 52.292,-65.16 U3.4 ; 44.803,-65.029 C6.2 ; C6.2@44.972,-57.617 44.803,-57.448 44.803,-55.259 44.896,-55.166 U4.5
+9: C1.2 P1.9 U1.1 U1.2 | length 15.7
  Bottom Layer w0.254: P1.9 7.563,-49.668 8.579,-48.652 15.106,-48.652 15.595,-49.141 U1.1 U1.2
+12: C2.2 C9.2 C13.2 P1.15 P1.16 U1.8 U2.3 U5.4 | length 73.5
  Top Layer w0.254: U5.4 36.941,-59.367 37.962,-59.367 44.272,-53.057 v1(44.272,-40.818)
  Bottom Layer w0.254: P1.16 7.486,-57.288 9.366,-55.408 12.053,-55.408 15.595,-58.95 15.595,-60.895 16.179,-61.479 25.52,-61.479 27.175,-63.134 C9.2 C9.2@27.375,-65.2 ; v1(44.272,-40.818) 44.272,-40.327 U2.3 48.655,-39.085 C13.2
  Bottom Layer w0.5: C9.2@27.375,-65.2 U5.4@30.345,-65.2
-5: C3.1 P2.16 U3.6 | length 15.8
  Top Layer w0.254: U3.6 61.017,-41.349 P2.16@61.017,-35.762
  Bottom Layer w0.5: U3.6 57.795,-44.84 60.64,-47.685 C3.1
Aux+: P4.1 RLY1.2 RLY1.3 | length 30.7
  Top Layer w0.254: RLY1.3 25.495,-28.491 25.495,-15.551 P4.1@26.088,-14.958
  Bottom Layer w0.5: RLY1.2@10.243,-32.523 RLY1.3
Batt+: P3.1 RLY1.5 | length 34.5
  Top Layer w0.254: P3.1@9.982,-15 9.982,-22.848 20.934,-33.8 30.266,-33.8 RLY1.5
"Battery Thermistor": P1.2 P3.3 R24.1 | length 38.2
  Bottom Layer w0.254: P1.2 2.533,-39.508 2.533,-18.549 7.823,-13.259 R24.1@14.217,-13.259 ; R24.1 14.267,-13.288 14.365,-13.386 14.365,-14.365 P3.3
BBB_PWR_SW: P1.3 P4.2 | length 43.1
  Bottom Layer w0.254: P1.3 5.073,-40.778 5.073,-30.274 18.786,-16.561 21.859,-16.561 24.508,-13.911 27.581,-13.911 P4.2
GND: C1.1 C2.1 C3.2 C4.2 C6.1 C7.1 C10.1 C11.2 C12.1 C13.1 P1.6 P1.8 P1.10 P1.12 P1.13 P1.14 P2.1 P2.3 P2.5 P2.7 P2.9 P2.11 P2.13 P2.15 P3.2 P4.3 P4.4 RLY1.1 U1.3 U2.1 U2.4 U2.5 U3.2 U3.5 U4.3 U4.6 U4.7 U5.2 U5.6 U6.2 U6.3 U6.5 U13.2 | length 14
  Bottom Layer w0.254: C3.2@60.541,-51.985 C3.2
  Bottom Layer w0.5: C4.2@51.987,-60.539 53.429,-60.539 57.047,-56.921 57.047,-55.478 U3.5 57.625,-55 60.541,-52.084 C3.2@60.541,-51.985
NetC8_2: C8.2 U4.4 | length 3
  Bottom Layer w0.254: U4.4 52.434,-55.166 C8.2
NetDS7_1: DS7.1 F1.1 RLY1.4 | length 37.5
  Top Layer w0.254: RLY1.4 26.503,-28.467 F1.1@27.044,-27.926 ; F1.1@27.044,-26.554 27.044,-25.025 39.46,-12.609 39.46,-1.756 DS7.1
  Top Layer w0.5: F1.1@26.272,-26.994 F1.1@27.102,-26.753 ; F1.1@27.044,-27.926 F1.1@27.044,-26.554
NetDS7_2: DS7.2 R25.2 | length 3.3
  Top Layer w0.254: R25.2@41.395,-4.71 DS7.2@41.395,-1.408
NetP2_2: P2.2 P3.4 R1.1 | length 52.4
  Top Layer w0.254: v1(16.732,-10.298) 16.905,-10.471 16.905,-14.365 P3.4 17.653,-15 17.653,-15.113 20.363,-17.823 v1(20.396,-17.823) ; v1@46.094,-17.664 46.312,-17.882 46.507,-17.882 46.544,-17.918 P2.2
  Bottom Layer w0.254: R1.1 16.732,-7.763 v1(16.732,-10.298) ; v1(20.396,-17.823) 46.126,-17.823 v1(46.158,-17.855)
NetP2_4: P2.4 P3.5 R2.1 | length 51.8
  Top Layer w0.254: v1(19.272,-10.298) 19.445,-10.471 19.445,-14.43 20.015,-15 P3.5 23.089,-18.009 v1(23.089,-19.482) ; v1(43.76,-19.49) 59.933,-19.49 60.953,-20.51 P2.4@60.953,-20.633
  Bottom Layer w0.254: R2.1 19.272,-7.763 v1(19.272,-10.298) ; v1(23.089,-19.482) 43.752,-19.482 v1(43.76,-19.49)
Power_IN: C5.1 C9.1 C10.2 F1.2 R25.1 U3.3 U5.3 U6.1 | length 103.9
  Top Layer w0.254: 33.781,-26.554 33.832,-26.503 ; C10.2@37.684,-20.966 37.684,-19.347 40.772,-16.259 40.772,-7.274 41.27,-6.776 R25.1
  Top Layer w0.5: 33.832,-26.503 37.479,-26.503 37.643,-26.339 37.643,-21.007 C10.2@37.684,-20.966 ; U6.1@37.859,-26.554 37.91,-26.503 39.947,-26.503 v1(39.998,-26.554)
  Bottom Layer w0.254: C5.1@37.205,-64.925 C5.1
  Bottom Layer w0.5: U5.3@10.025,-57.58 10.025,-62.875 12.185,-65.035 22.84,-65.035 C9.1 22.875,-65.95 25.135,-68.21 35.934,-68.21 36.892,-67.252 36.892,-66.662 C5.1@37.442,-66.112 ; C5.1@37.205,-64.925 U3.3 39.998,-54.747 v1(39.998,-26.554)
SPI0_CS0: P2.6
SPI0_MISO: P2.8
SPI0_MOSI: P2.10
SPI0_SCLK: P2.12
Sys_Pwr_Enable: P1.7 U13.3 | length 9.1
  Bottom Layer w0.254: P1.7@6.343,-47.199 15.123,-47.199 U13.3
ZH: P1.11 U2.2 | length 69.9
  Top Layer w0.254: P1.11 5.904,-52.208 5.105,-51.41 5.105,-38.278 5.588,-37.795 v1(15.113,-37.795)
  Bottom Layer w0.254: v1(15.113,-37.795) 26.924,-37.795 29.54,-35.179 29.54,-26.746 32.41,-23.876 43.078,-23.876 43.891,-24.689 43.891,-26.476 U2.2
pads on no net: P1.4 P1.5 U1.4 U1.6 U1.7 U2.6 U2.7 U2.8 U5.5 U6.4 U6.6

## Polygon pours and split planes (outlines as drawn)
GND on Top Layer "NONET_L01_P000" (solid, shelved, pour order 0): -0.025,0.002 -0.025,-70.102 67.031,-70.102 67.031,0.002
GND on Bottom Layer "GND" (solid, shelved, pour order 10): 59.404,-0.622 59.404,-16.37 36.29,-16.37 36.29,-0.622
no net on Bottom Layer "C21_1" (solid, shelved, pour order 8): 48.99,-10.02 43.402,-10.02 43.402,-14.846 45.688,-14.846 45.688,-12.052 48.99,-12.052
ZH on Bottom Layer "ZH" (solid, shelved, pour order 6): 50.006,-7.226 37.306,-7.226 37.306,-9.766 37.56,-9.512 50.006,-9.512
+5 on Bottom Layer "5V" (solid, shelved, pour order 4): 59.658,-9.258 50.26,-9.258 50.26,-4.94 50.768,-4.432 59.658,-4.432
GND on Bottom Layer "NONET_L02_P002" (solid, shelved, pour order 2): 67,0 67,-70 0,-70 0,0

## Silkscreen, mask and mechanical layers (free items; w line width, h text height)
Top Overlay:
  circle w0.1: c15.316,-23.774 r4.663
  circle w0.254: c15.316,-23.774 r5
  lines w0.1: 13.792,-21.412 14.554,-22.174 15.316,-21.666 14.3,-22.936 15.824,-22.174 14.808,-23.444 16.332,-22.682 15.316,-23.952 16.84,-23.19 15.824,-24.46 17.348,-23.698 16.84,-24.46 17.602,-25.222
  lines w0.254: 13.284,-21.285 14.3,-21.285 ; 13.792,-21.412 13.792,-25.222 17.602,-25.222 ; 17.729,-25.73 17.729,-24.714
  text "Fuse" at 43.173,-2.17 h1
  text "LM-008 / Power Input Module" at 48.209,-11.684 h1
  text "REV A" at 48.311,-12.852 h1
  text "Aux/ lid" at 25.222,-12.954 h1
  text "Battery" at 10.922,-13.233 h1
  text "ZLS Corp" at 48.311,-14.681 h1
  text "ZLS" at 14.3,-26.822 h1.2
Bottom Overlay:
  circle w0.1: c100.305,-41.224 r4.663
  circle w0.254: c100.305,-41.224 r5
  lines w0.1: 98.019,-42.672 98.781,-41.91 98.273,-41.148 99.797,-41.91 98.781,-40.64 100.305,-41.402 99.289,-40.132 100.813,-40.894 99.797,-39.624 101.321,-40.386 100.305,-39.116 101.067,-39.624 101.829,-38.862
  lines w0.254: 97.892,-43.18 97.892,-42.164 ; 98.019,-42.672 101.829,-42.672 101.829,-38.862 ; 101.321,-38.735 102.337,-38.735
  text "LM-008" at 12.493,-18.004 h1.52
  text "REV A" at 12.493,-19.909 h1
  text "ZLS Corp" at 12.493,-21.814 h1
  text "ZLS" at 101.321,-44.272 h1.2

## Dimensions
-0.007,-69.988 to 67,-71 on Mechanical 1
-0.007,-69.988 to -0.007,0.012 on Mechanical 1
3.803,-66.178 to -0.007,-69.988 on Mechanical 1
3.803,-66.178 to 63.493,-66.178 on Mechanical 1
63.493,-66.178 to 63.493,-6.488 on Mechanical 1
3.803,-66.178 to 3.803,-57.288 on Mechanical 1
63.493,-66.178 to 63.493,-35.698 on Mechanical 1